# Altium PCB PCB.PcbDoc
Units mm, origin at the board's own origin, x right, y up, seen from the top; angles counter-clockwise.
Board outline 50 x 22 mm, 2 copper layers (TOP, BOT), stack 1.636 mm thick; 15 components, 7 nets, 33 pads, 166 vias.
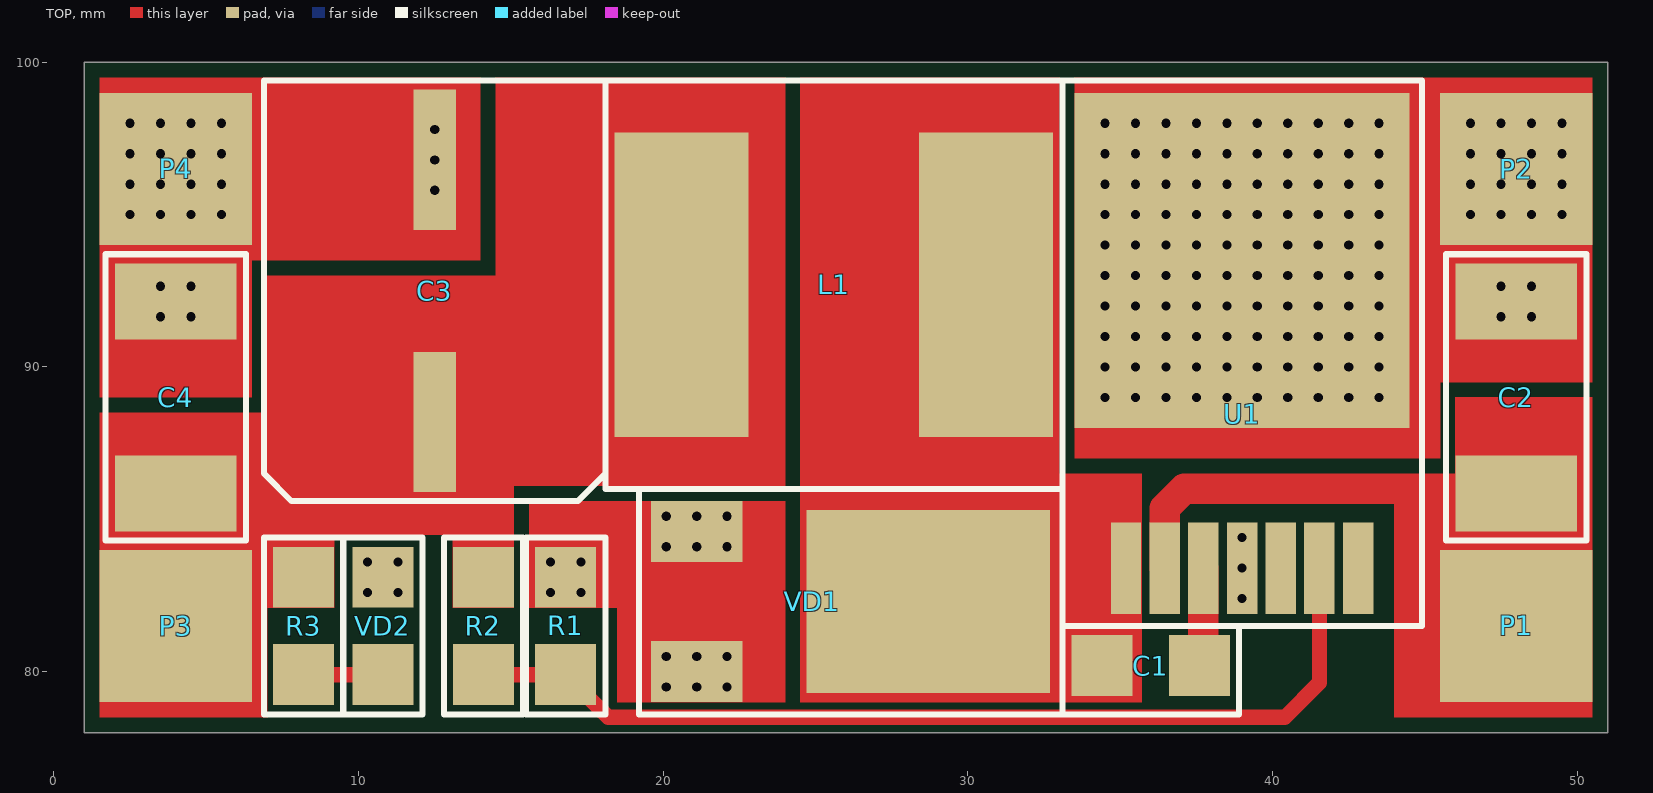
[diagram p0: TOP view]
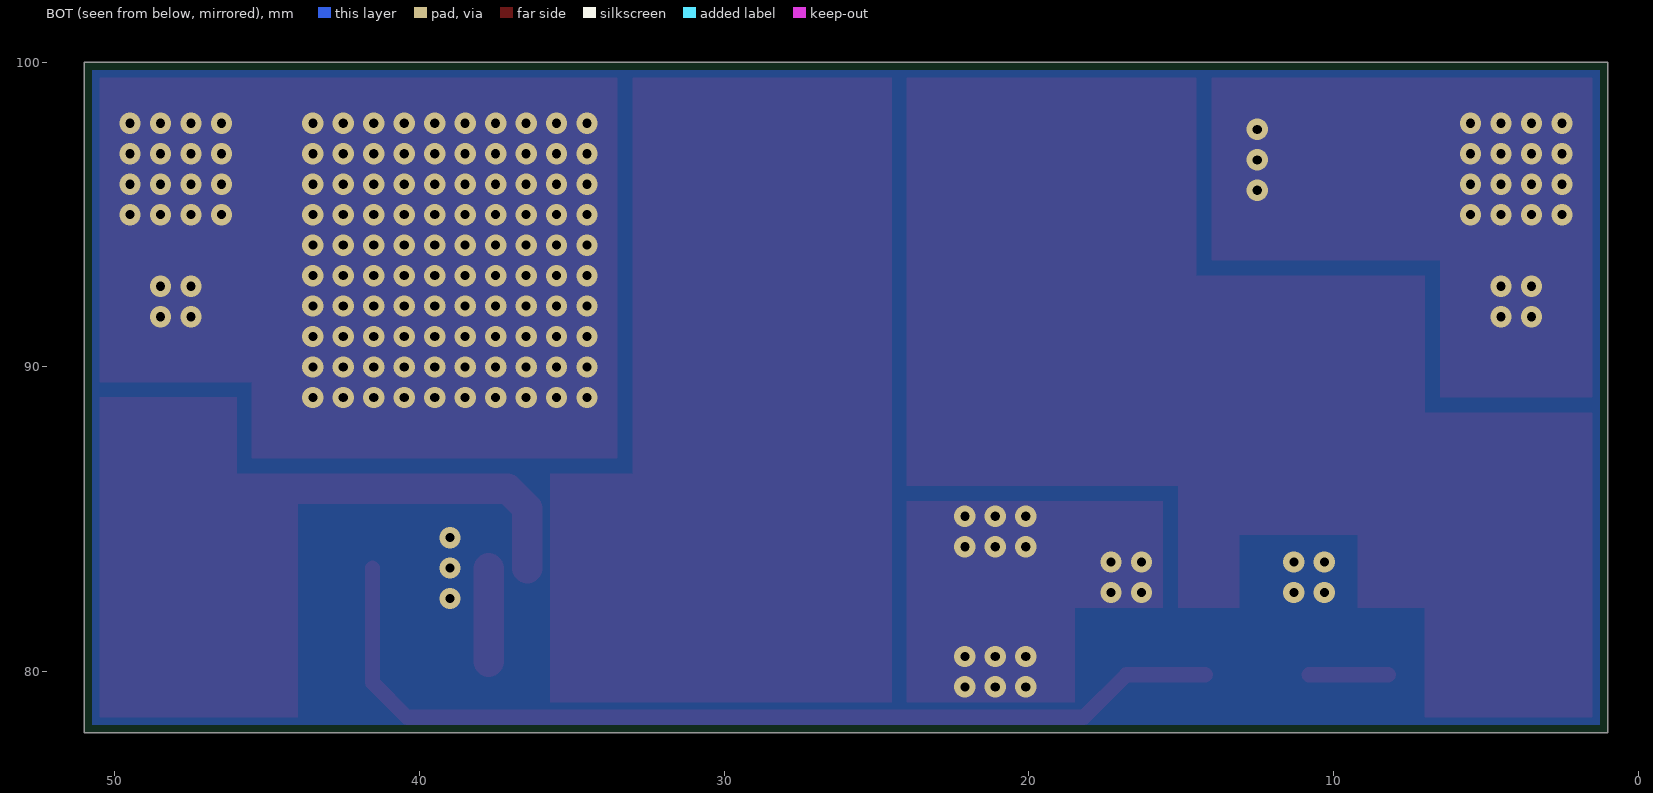
[diagram p1: BOT view, seen from below]
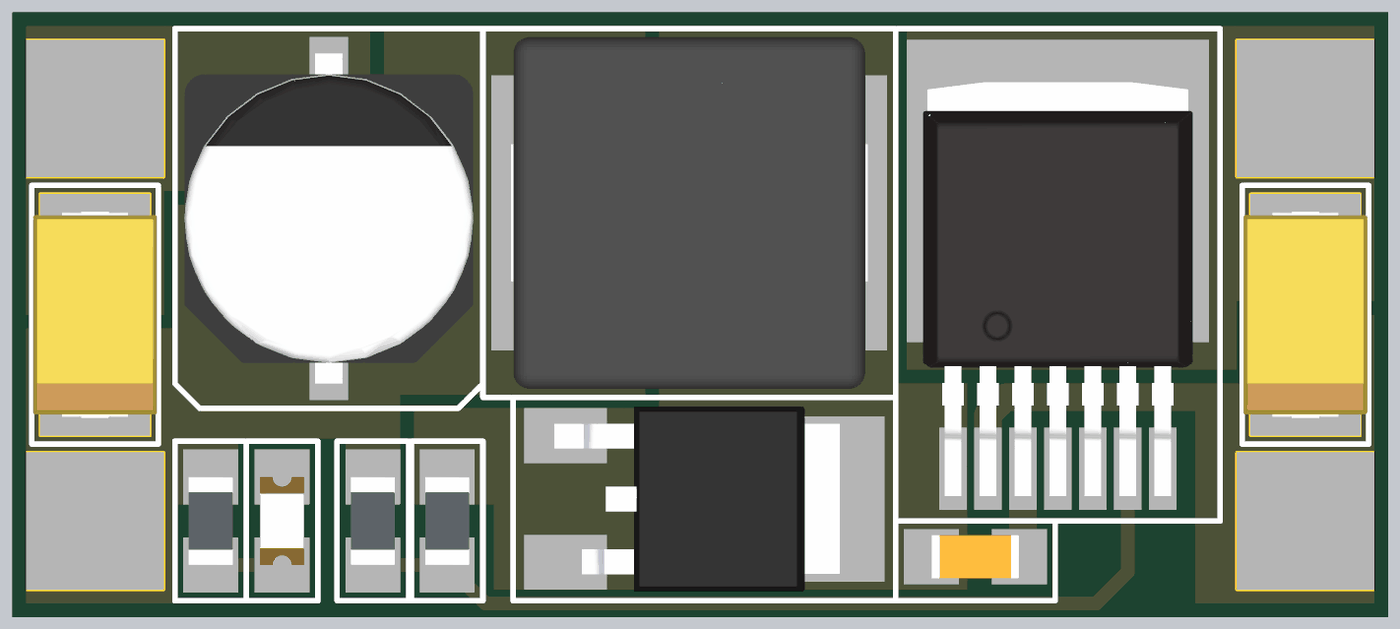
[diagram p2: 3D render of the assembled board from above, using the file's embedded part models]

## Layer stack, top to bottom
Top Solder: solder mask 0.0102, Solder Resist, Dk 3.5
TOP: signal copper 0.018
Dielectric 1: core 1.6, FR-4, Dk 4.2
BOT: signal copper 0.018
Bottom Solder: solder mask 0.0102, Solder Resist, Dk 3.5

## Board outline
1,78 1,100 51,100 51,78

## Design rules (kind name [scope] priority, off if disabled: settings)
AssemblyTestPointUsage [All] p1 off:
AssemblyTestpoint [All] p1 off: testpointundercomponent=TRUE minsize=1.016 maxsize=2.54 preferedsize=1.524 minholesize=0 maxholesize=1.016 preferedholesize=0.813 testpointgrid=0.025 usegrid=TRUE gridtolerance=0 allowsidetop=TRUE allowsidebottom=TRUE
BoardOutlineClearance [Not(OnTopSilkscreen Or OnBottomSilkscreen)] p1: gap=0.25 ignorepadtopadclearanceinfootprint=FALSE
Clearance Clearance_NPTH [IsPad And Not(PadIsPlated) And HasRoundHole] p1: gap=0.2 ignorepadtopadclearanceinfootprint=FALSE except(0.25: Arc-Hole Track-Hole SMDPad-Hole THPad-Hole Via-Hole Fill-Hole Poly-Hole Region-Hole Text-Hole) // Non-plated hole to copper
Clearance Clearance_PTH_INT [IsPad And PadIsPlated And HasRoundHole vs OnMid] p2: gap=0.2 ignorepadtopadclearanceinfootprint=FALSE except(0.35: Arc-Hole Track-Hole SMDPad-Hole THPad-Hole Via-Hole Fill-Hole Poly-Hole Region-Hole Text-Hole) // Plated hole without pad to copper
Clearance Clearance_PAD_VIA [IsPad And Not(OnMid) And OnOutside vs IsVia And OnOutside] p3: gap=0.2 ignorepadtopadclearanceinfootprint=FALSE // Minimum gap between SMD pad and via for valid solder mask bridge
Clearance [All] p4: gap=0.2 ignorepadtopadclearanceinfootprint=TRUE except(0.49: Fill-Poly Fill-Region Poly-Poly Poly-Region Region-Region) // Class 4 generic clearance
ComponentClearance ComponentClearanceTop [OnLayer('TOP') And Not(InComponentClass('NoCollision')) And Not(IsNetTieComponent) vs OnLayer('TOP') And Not(InComponentClass('NoCollision')) And Not(IsNetTieComponent)] p1: gap=0.15 collisioncheckmode=3 verticalgap=0.5 showdistances=TRUE
ComponentClearance ComponentClearanceBot [OnLayer('BOT') And Not(InComponentClass('NoCollision')) And Not(IsNetTieComponent) vs OnLayer('BOT') And Not(InComponentClass('NoCollision')) And Not(IsNetTieComponent)] p2: gap=0.15 collisioncheckmode=3 verticalgap=0.5 showdistances=TRUE
DiffPairsRouting [All] p1 off: maxlimit=0.254 minlimit=0.254 mostfreqgap=0.254 toplayer_minwidth=0.381 toplayer_maxwidth=0.381 toplayer_prefwidth=0.381 bottomlayer_minwidth=0.381 bottomlayer_maxwidth=0.381 bottomlayer_prefwidth=0.381 maxuncoupledlength=12.7
FabricationTestPointUsage [All] p1 off: valid=0 allowmultiple=FALSE
FabricationTestpoint [All] p1 off: side=3 testpointundercomponent=TRUE minsize=1.016 maxsize=2.54 preferedsize=1.524 minholesize=0 maxholesize=1.016 preferedholesize=0.813 testpointgrid=0.025 allowsidetop=TRUE allowsidebottom=TRUE usegrid=TRUE gridtolerance=0
FanoutControl Fanout_BGA [IsBGA] p1 off: bgadir=Out bgaviamode=Centered fanoutstyle=Auto fanoutdirection=Alternating viagrid=0.025 // Fanout_BGA (Default Rule)
FanoutControl Fanout_LCC [IsLCC] p2 off: bgadir=Out bgaviamode=Centered fanoutstyle=Auto fanoutdirection=Alternating viagrid=0.025 // Fanout_LCC (Default Rule)
FanoutControl Fanout_SOIC [IsSOIC] p3 off: bgadir=Out bgaviamode=Centered fanoutstyle=Auto fanoutdirection=Alternating viagrid=0.025 // Fanout_SOIC (Default Rule)
FanoutControl Fanout_Small [(CompPinCount < 5)] p4 off: bgadir=Out bgaviamode=Centered fanoutstyle=Auto fanoutdirection=OutThenIn viagrid=0.025 // Fanout_Small (Default Rule)
FanoutControl Fanout_Default [All] p5 off: bgadir=Out bgaviamode=Centered fanoutstyle=Auto fanoutdirection=Alternating viagrid=0.025 // Fanout_Default (Default Rule)
Height [All] p1 off: minheight=0 maxheight=35 prefheight=15
HoleSize HoleSize_PTH [IsVia or (IsPad And PadIsPlated)] p1: absolutevalues=TRUE maxlimit=6 minlimit=0.3 maxpercent=80.000 minpercent=20.000 // Plated holes
HoleSize HoleSize_NPTH [IsPad And Not(PadIsPlated)] p2: absolutevalues=TRUE maxlimit=6 minlimit=0.5 maxpercent=80.000 minpercent=20.000 // Non-plated holes
HoleToHoleClearance [All] p1 off: gap=0.4 allowstackedmicrovias=FALSE
LayerPairs [All] p1 off: enforce=TRUE
MinimumAnnularRing [All] p1: minimumring=0.2
MinimumSolderMaskSliver [Not(InComponent('DD101'))] p1: minsoldermaskwidth=0.15
NetAntennae [Not(InNet('5VIN') Or InNet('GND') Or  InNet('GNDBAT'))] p1: netantennaetolerance=0
PlaneClearance [All] p1 off: clearance=1
PlaneConnect [All] p1 off: planeconnectstyle=Relief reliefexpansion=0.5 reliefentries=4 reliefconductorwidth=0.5 reliefairgap=0.5
PolygonConnect PolygonConnect_Direct [IsPolygon vs InPadClass('HeatsinkPad') Or IsVia or InNet('PGND') or InNet('DGND')] p1: connectstyle=Direct reliefconductorwidth=1 reliefentries=4 polygonreliefangle="45 Angle" airgapwidth=0.5 // Direct connection between POLYCONN pads and shield polygons
PolygonConnect [All] p2: connectstyle=Direct reliefconductorwidth=0.4 reliefentries=4 polygonreliefangle="90 Angle" airgapwidth=0.2
RoutingCorners [All] p1 off: cornerstyle=Round minsetback=2 maxsetback=2
RoutingLayers [All] p1 off: top layer_v5=TRUE bottom layer_v5=TRUE
RoutingPriority [All] p1 off: routingpriority=0
RoutingTopology [All] p1 off: topology=Shortest
RoutingVias [All] p1: holewidth=0.3 width=0.6 viastyle="Through Hole" minholewidth=0.3 minwidth=0.5 maxholewidth=1.2 maxwidth=5
SilkToBoardRegionClearance [All] p1 off:
SilkToSilkClearance [All] p1 off: silktosilkclearance=0
SilkToSolderMaskClearance SilkscreenOverComponentPads [IsPad] p1: minsilkscreentomaskgap=0.15 clearancetoexposedcopper=TRUE
SolderMaskExpansion [All] p1: expansion=0.05
Width [All] p1: maxlimit=90 minlimit=0.2 preferedwidth=0.2 // Class 4
4 further rules are at their usual default settings.

## Components (designator, comment, footprint, x,y, rotation, side; value= is the part's Value field where it differs from the comment)
C1 "0.1u" C_1206/3216 36,80.2 r180 top
C2 "47u" TECAP_TYPE_D 48,89 r90 top
C3 "1000u" ECAP_D10.0x10.5 12.5,92.5 r90 top
C4 "47u" TECAP_TYPE_D 4,89 r90 top
L1 "10uH B82477G4103M" L_13x13 25.6,92.7 r180 top
P1 "" WIRE_SMD_5X5 48,81.5 r0 top
P2 "" WIRE_SMD_5X5 48,96.5 r0 top
P3 "" WIRE_SMD_5X5 4,81.5 r0 top
P4 "" WIRE_SMD_5X5 4,96.5 r0 top
R1 "1k1" R_1206/3216 16.8,81.5 r90 top
R2 "4k7" R_1206/3216 14.1,81.5 r90 top
R3 "68R" R_1206/3216 8.2,81.5 r90 top
U1 "LM2678" TO263-7/D2PAK-7 39,91 r0 top
VD1 "VS-50WQ10FNTR" TO252AA/DPAK 26.7,82.3 r270 top
VD2 "TO-3216BC-BF (G)" LED_1206/3216 10.8,81.5 r90 top

## Footprints (in the part's own frame and the unit in brackets; to place one, negate y for a bottom-side part, rotate by r counter-clockwise, add the part's x,y. Pads: shape width x height; smd on the part's side, far side on the other; paste and mask are expansions set on the pad)
C_1206/3216 [mm] "Capacitor, SMD, 1206 (3216 metric)"
  rect 2x2 smd mask+0: 1(-1.6,0) 2(1.6,0)
  silkscreen extent -2.9,-1.3 2.9,1.6, body extent -1.6,-0.8 1.6,0.8, height 1.45
ECAP_D10.0x10.5 [mm] "Ñapacitor, D10.0x10.5, SMD"
  rect 4.6x1.4 smd mask+0: 1(-4.3,0) 2(4.3,0)
  silkscreen extent -6.9,-5.6 6.9,5.6, body extent -6,-5.25 6,5.25, height 10.5
L_13x13 [mm] "Inductor SCDS127T"
  rect 4.4x10 smd mask+0: 1(-5,0) 2(5,0)
  silkscreen extent -7.5,-6.7 7.5,6.7, body extent -6.49,-6.4 6.48,6.4, height 8.1
LED_1206/3216 [mm] "LED, SMD, 1206 (3216 metric)"
  rect 2x2 smd mask+0: A(-1.6,0) C(1.6,0)
  silkscreen extent -2.9,-1.3 2.9,1.3, body extent -1.6,-0.8 1.6,0.8, height 1.1
R_1206/3216 [mm] "Resistor, SMD, 1206 (3216 metric)"
  rect 2x2 smd mask+0: 1(-1.6,0) 2(1.6,0)
  silkscreen extent -2.9,-1.3 2.9,1.3, body extent -1.6,-0.8 1.6,0.8, height 0.6
TECAP_TYPE_D [mm] "Tantalum capacitor, Type D, SMD"
  rect 2.5x4 smd: 1(-3.15,0) 2(3.15,0)
  silkscreen extent -4.7,-2.3 4.7,2.3, body extent -3.75,-2.25 3.75,2.25, height 3.1
TO252AA/DPAK [mm] "TO252AA/DPAK package"
  rect 2x3 smd mask+0: 1(-2.3,-5.6) 2(2.3,-5.6)
  rect 6x8 smd mask+0: 3(0,2)
  silkscreen extent -3.7,-7.5 3.7,6.4, body extent -3.37,-6.01 3.37,4.38, height 2.39
TO263-7/D2PAK-7 [mm] "TO263/D2PAK package, 7 pins version"
  rect 1x3 smd mask+0: 1(-3.81,-7.6) 2(-2.54,-7.6) 3(-1.27,-7.6) 4(0,-7.6) 5(1.27,-7.6) 6(2.54,-7.6) 7(3.81,-7.6)
  rect 11x11 smd mask+0: 8(0,2.5)
  silkscreen extent -5.9,-9.5 5.9,8.4, body extent -4.91,-8.6 4.91,6.45, height 4.22
WIRE_SMD_5X5 [mm]
  rect 5x5 smd: 1(0,0)

## Part data
C1: library part Capacitor, "Non-polarized capacitor"
C2 C3 C4: library part "Capacitor polar", "Polarized capacitor"
L1: library part Inductor, "Inductor"
P1 P2 P3 P4: library part "Header 1", "Header, 1-Pin", LatestRevisionDate=17-Jul-2002, LatestRevisionNote="Re-released for DXP Platform.", Publisher="Altium Limited"
R1 R2 R3: library part Resistor, "Resistor"
U1: "DC-DC step-down switching regulator"
VD1: library part Schottky, "Schottky diode"
VD2: library part LED, "LED"

## Via types
v1: diameter 0.7, hole 0.3, TOP to BOT, tented both sides, 166 vias

## Nets (pads, with @x,y where several pads share a name; then routed paths per layer and width w, separated by ;. In a path a pad name is that pad's centre, name@x,y a point inside that pad or via, vN(x,y) a via of type N, cw(c..) or ccw(c..) an arc to the next point about the centre after c; other vN are vias at no path point)
GND: C2.2 C3.2 C4.2 P2.1 P4.1 R1.2 U1.4 U1.8 VD1.1 VD1.2 VD2.C
  other v1: 20.1,79.5 21.1,79.5 22.1,79.5 20.1,80.5 21.1,80.5 22.1,80.5 39,82.4 10.3,82.6 11.3,82.6 16.3,82.6 17.3,82.6 39,83.4 10.3,83.6 11.3,83.6 16.3,83.6 17.3,83.6 20.1,84.1 21.1,84.1 22.1,84.1 39,84.4 20.1,85.1 21.1,85.1 22.1,85.1 34.5,89 35.5,89 36.5,89 37.5,89 38.5,89 39.5,89 40.5,89 41.5,89 42.5,89 43.5,89 34.5,90 35.5,90 36.5,90 37.5,90 38.5,90 39.5,90 40.5,90 41.5,90 42.5,90 43.5,90 34.5,91 35.5,91 36.5,91 37.5,91 38.5,91 39.5,91 40.5,91 41.5,91 42.5,91 43.5,91 3.5,91.65 4.5,91.65 47.5,91.65 48.5,91.65 34.5,92 35.5,92 36.5,92 37.5,92 38.5,92 39.5,92 40.5,92 41.5,92 42.5,92 43.5,92 3.5,92.65 4.5,92.65 47.5,92.65 48.5,92.65 34.5,93 35.5,93 36.5,93 37.5,93 38.5,93 39.5,93 40.5,93 41.5,93 42.5,93 43.5,93 34.5,94 35.5,94 36.5,94 37.5,94 38.5,94 39.5,94 40.5,94 41.5,94 42.5,94 43.5,94 2.5,95 3.5,95 4.5,95 5.5,95 34.5,95 35.5,95 36.5,95 37.5,95 38.5,95 39.5,95 40.5,95 41.5,95 42.5,95 43.5,95 46.5,95 47.5,95 48.5,95 49.5,95 12.5,95.8 2.5,96 3.5,96 4.5,96 5.5,96 34.5,96 35.5,96 36.5,96 37.5,96 38.5,96 39.5,96 40.5,96 41.5,96 42.5,96 43.5,96 46.5,96 47.5,96 48.5,96 49.5,96 12.5,96.8 2.5,97 3.5,97 4.5,97 5.5,97 34.5,97 35.5,97 36.5,97 37.5,97 38.5,97 39.5,97 40.5,97 41.5,97 42.5,97 43.5,97 46.5,97 47.5,97 48.5,97 49.5,97 12.5,97.8 2.5,98 3.5,98 4.5,98 5.5,98 34.5,98 35.5,98 36.5,98 37.5,98 38.5,98 39.5,98 40.5,98 41.5,98 42.5,98 43.5,98 46.5,98 47.5,98 48.5,98 49.5,98
NetC1_1: C1.1 U1.3 | length 3.1
  TOP w1: C1.1@37.73,80.33 U1.3
NetC1_2: C1.2 L1.1 U1.1 VD1.3
NetR1_1: R1.1 R2.1 U1.6 | length 32.2
  TOP w0.5: R2.1@14.2,79.9 R1.1 18.2,78.5 40.4,78.5 41.54,79.64 U1.6
NetR3_1: R3.1 VD2.A | length 2.6
  TOP w0.5: R3.1 VD2.A
VIN_11V1: C2.1 P1.1 U1.2 | length 10.5
  TOP w1: U1.2 36.46,85.36 37.1,86 44.7,86
VOUT: C3.1 C4.1 L1.2 P3.1 R2.2 R3.2
pads on no net: U1.5 U1.7

## Polygon pours and split planes (outlines as drawn)
GND on BOT "BOT_GND" (solid, pour order 0): 1,78 1,100 51,100 51,78

## Other copper
TOP:
  region net NetC1_2: 33,99.5 33,86.5 35.7,86.5 35.7,79 24.5,79 24.5,99.5
  region net GND: 15.6,85.6 15.6,82.1 18.5,82.1 18.5,79 24,79 24,85.6
  region net VOUT: 7,93 7,88.5 1.5,88.5 1.5,78.5 7,78.5 7,82.1 9.2,82.1 9.2,84.5 13.1,84.5 13.1,82.1 15.1,82.1 15.1,86.1 24,86.1 24,99.5 14.5,99.5 14.5,93
  region net VIN_11V1: 44,78.5 50.5,78.5 50.5,89 46,89 46,86.5 44,86.5
  region net GND: 50.5,89.5 45.5,89.5 45.5,87 33.5,87 33.5,99.5 48.5,99.5 50.5,99.5
  region net GND: 1.5,89 6.5,89 6.5,93.5 14,93.5 14,99.5 7.2,99.5 1.5,99.5

## Silkscreen, mask and mechanical layers (free items; w line width, h text height)
M4-BOARD:
  the board outline again, w0.1